# Altium PCB PCB1.PcbDoc
Units mm, origin at the board's own origin, x right, y up, seen from the top; angles counter-clockwise.
Board outline 45.13 x 20.13 mm, 4 copper layers (Top Layer, Signal Layer 1, Signal Layer 2, Bottom Layer), stack 0.778 mm thick; 52 components, 39 nets, 241 pads, 74 vias.
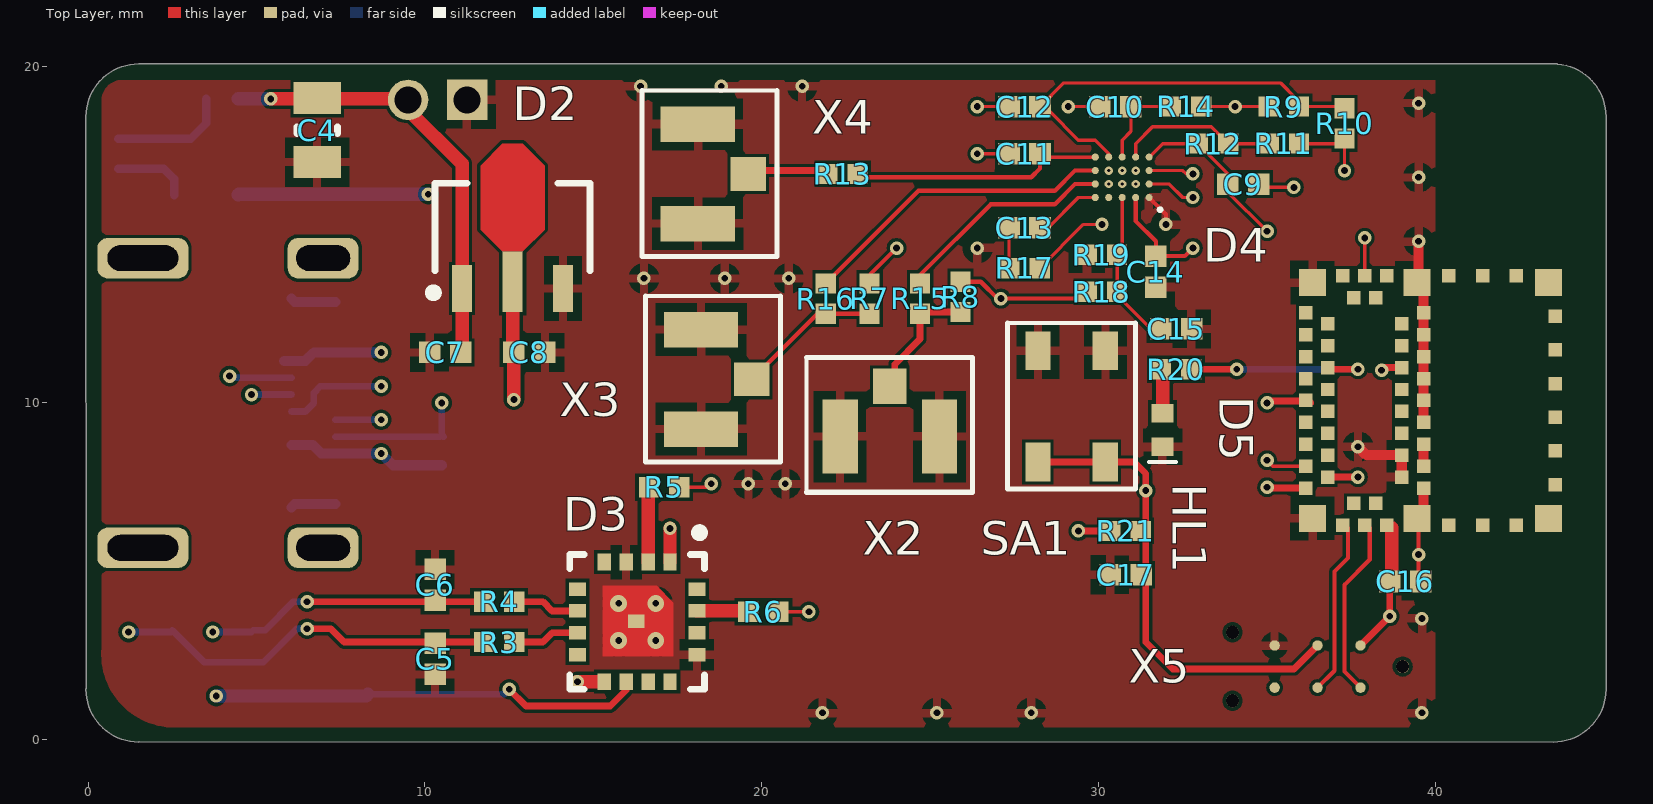
[diagram p0: Top Layer view]
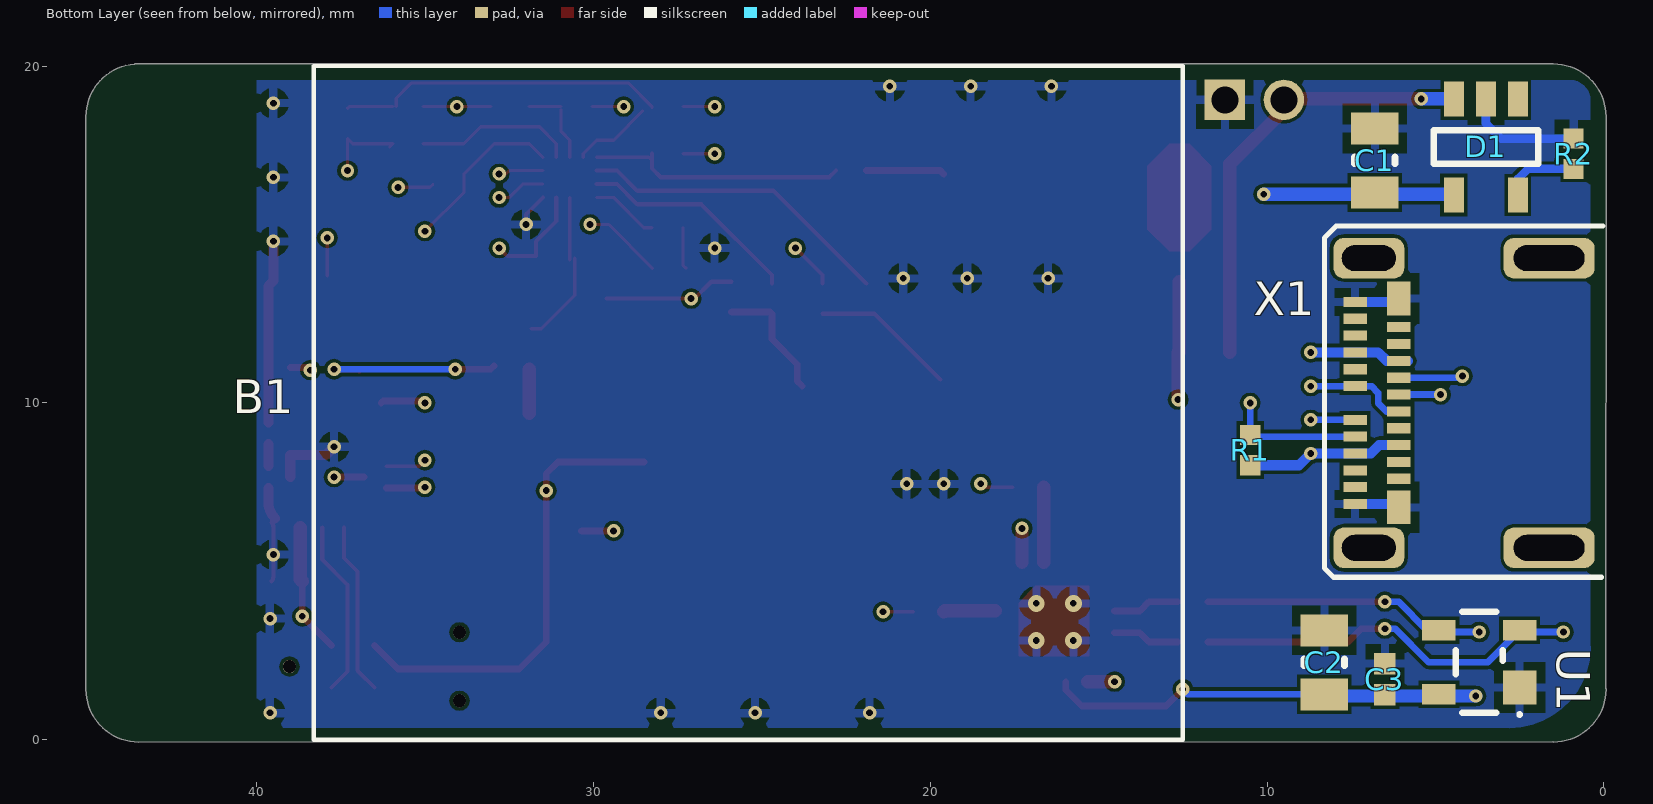
[diagram p1: Bottom Layer view, seen from below]
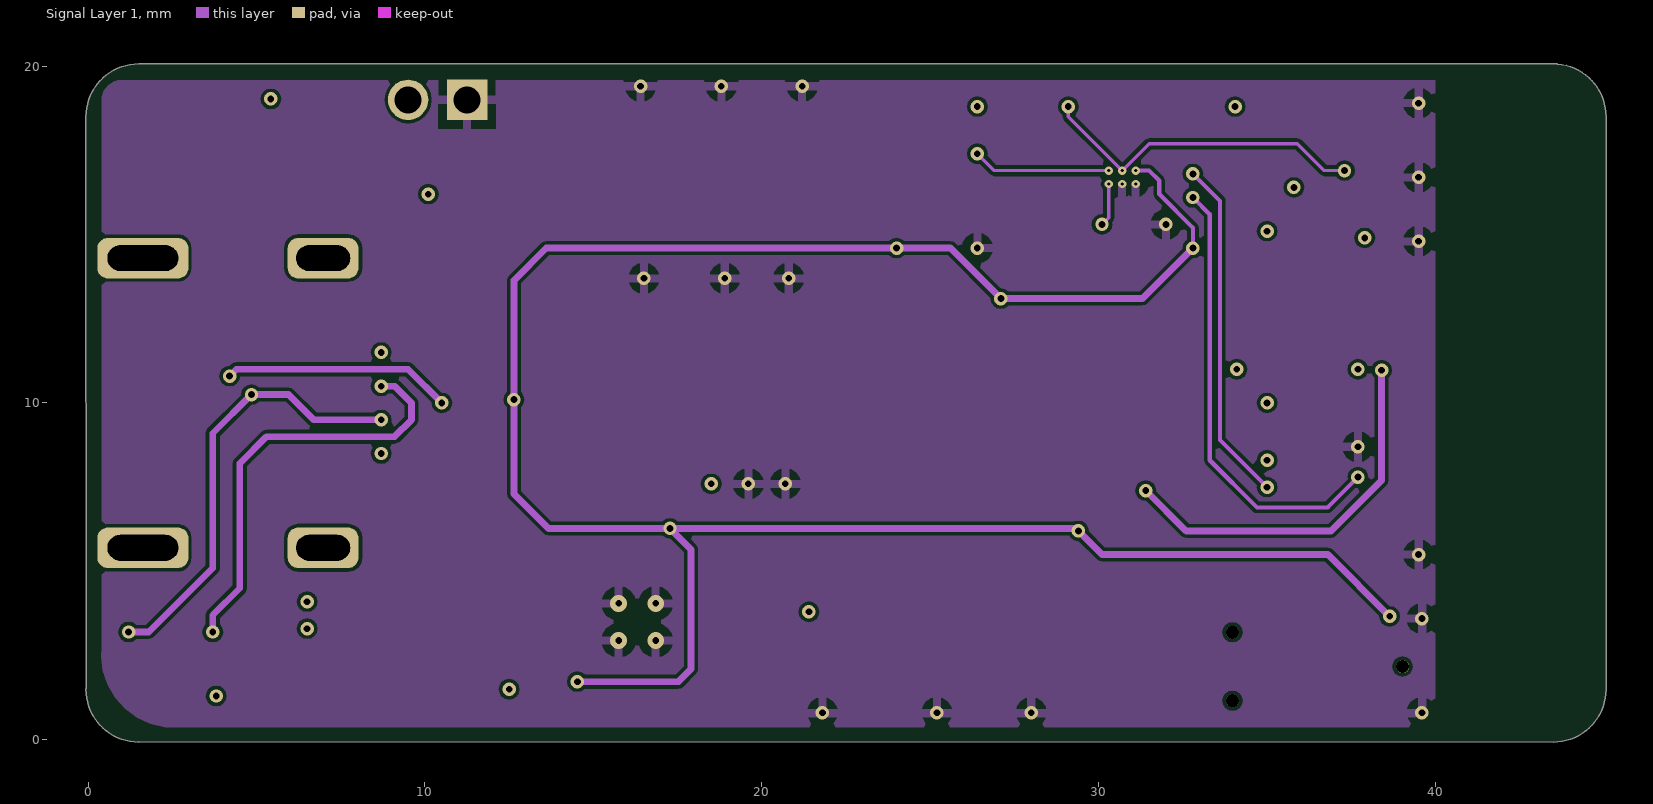
[diagram p2: Signal Layer 1]
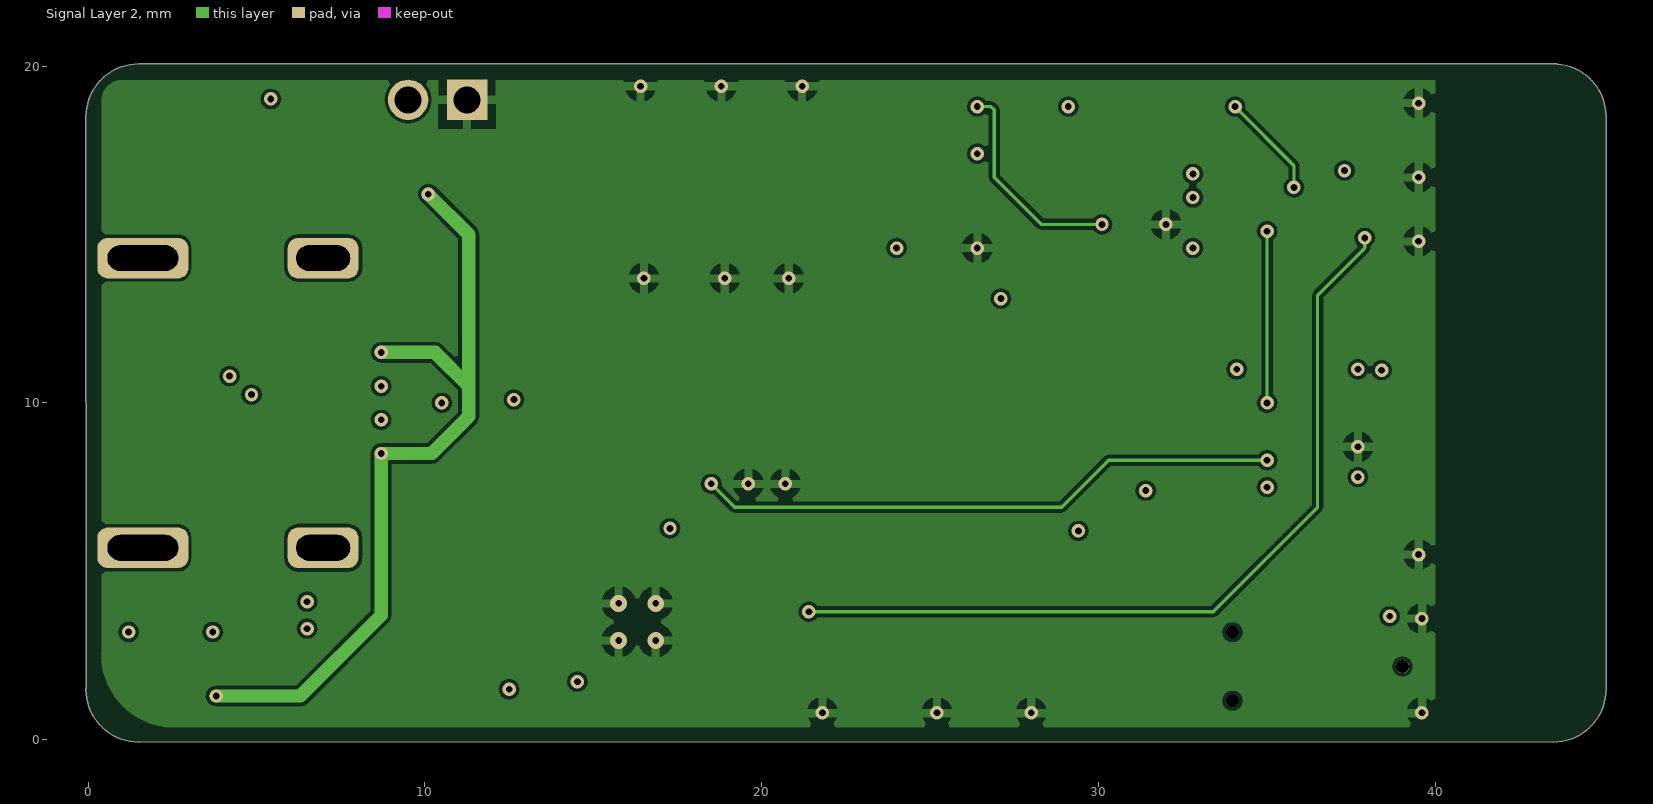
[diagram p3: Signal Layer 2]

## Layer stack, top to bottom
Top Solder: solder mask 0.0102, Solder Resist, Dk 3.5
Top Layer: signal copper 0.0356
Dielectric 1: core 0.254, FR-4, Dk 4.2
Signal Layer 1: signal copper 0.036
Dielectric 3: prepreg 0.127, Dk 4.2
Signal Layer 2: signal copper 0.036
Dielectric 2: core 0.254, Dk 4.2
Bottom Layer: signal copper 0.0356
Bottom Solder: solder mask 0.0102, Solder Resist, Dk 3.5

## Board outline
-0.063,1.52 -0.066,18.5 cw(c-0.003,18.5) -0.066,18.5 cw(c1.5,18.5) 1.5,20.066 43.6,20.066 cw(c43.6,20.003) 43.624,20.061 cw(c43.5,18.5) 45.066,18.5 45.066,1.5 cw(c43.5,1.5) 43.5,-0.066 cw(c43.5,-0.003) 43.493,-0.066 1.52,-0.063 cw(c1.5,-0.003) 1.5,-0.066 cw(c1.5,1.5) -0.066,1.5 cw(c-0.003,1.5)

## Design rules (kind name [scope] priority, off if disabled: settings)
Clearance [All] p1: gap=0.1 ignorepadtopadclearanceinfootprint=FALSE
MinimumSolderMaskSliver [All] p1: minsoldermaskwidth=0.1
PolygonConnect [All] p1: connectstyle=Relief reliefconductorwidth=0.254 reliefentries=4 polygonreliefangle="90 Angle" airgapwidth=0.254
RoutingVias [All] p1: holewidth=0.711 width=1.27 viastyle="Through Hole" minholewidth=0.1 minwidth=0.25 maxholewidth=10 maxwidth=10
SilkToSilkClearance [All] p1: silktosilkclearance=0
SilkToSolderMaskClearance [IsPad] p1: minsilkscreentomaskgap=0.1 clearancetoexposedcopper=TRUE
SolderMaskExpansion [All] p1: expansion=0.1
Width [All] p1: maxlimit=10 minlimit=0.1 preferedwidth=0.25
27 further rules are at their usual default settings.

## Components (designator, comment, footprint, x,y, rotation, side; value= is the part's Value field where it differs from the comment)
B1 "BAT" lION 25,10 r270 bottom
C1 "cap" CAP0805 6.8,17.2 r90 bottom
C2 "cap" CAP0805 8.3,2.3 r90 bottom
C3 "cap" CAP0402 6.5,1.8 r90 bottom
C4 "cap" CAP0805 6.8,18.1 r270 top
C5 "cap" CAP0402 10.3,2.4 r270 top
C6 "cap" CAP0402 10.3,4.6 r90 top
C7 "cap" CAP0402 10.6,11.5 r180 top
C8 "cap" CAP0402 13.1,11.5 r0 top
C9 "cap" CAP0402 34.3,16.5 r180 top
C10 "cap" CAP0402 30.5,18.8 r180 top
C11 "cap" CAP0402 27.8,17.4 r0 top
C12 "cap" CAP0402 27.8,18.8 r0 top
C13 "cap" CAP0402 27.8,15.2 r0 top
C14 "cap" CAP0402 31.7,13.9 r270 top
C15 "cap" CAP0402 32.3,12.2 r0 top
C16 "cap" CAP0402 39.1,4.7 r0 top
C17 "cap" CAP0402 30.8,4.9 r180 top
D1 "LION_BATTARY_CHARGER" SOT95P270X15-5N 3.5,17.6 r270 bottom
D2 "LDO" SOT89-150P409X160-3N 12.6,15.2 r90 top
D3 "FT230X" PQFN65P400X400X80_HS-17N 16.3,3.5 r270 top
D4 "AD8233" BGA20C40P5X4_204X171X56 30.7,16.7 r180 top
D5 "ISP1507AX" LGA6C330P2X3_800X800X100 39.85,10.075 r90 top
HL1 "LED" Chip2PinSM127P600-8N 31.9,9.2 r270 top
R1 "res" RES0402 10.5,8.6 r90 bottom
R2 "res" RES0402 0.9,17.4 r90 bottom
R3 "res" RES0402 12.2,2.9 r180 top
R4 "res" RES0402 12.2,4.1 r180 top
R5 "res" RES0402 17.1,7.5 r0 top
R6 "res" RES0402 20.05,3.8 r0 top
R7 "res" RES0402 23.2,13.1 r270 top
R8 "res" RES0402 25.9,13.15 r270 top
R9 "res" RES0402 35.5,18.8 r0 top
R10 "res" RES0402 37.3,18.3 r270 top
R11 "res" RES0402 35.5,17.7 r180 top
R12 "res" RES0402 33.4,17.7 r0 top
R13 "res" RES0402 22.4,16.8 r180 top
R14 "res" RES0402 32.6,18.8 r0 top
R15 "res" RES0402 24.7,13.1 r270 top
R16 "res" RES0402 21.9,13.1 r270 top
R17 "res" RES0402 27.8,14 r0 top
R18 "res" RES0402 30.1,13.3 r180 top
R19 "res" RES0402 30.1,14.4 r0 top
R20 "res" RES0402 32.3,11 r180 top
R21 "res" RES0402 30.8,6.2 r0 top
SA1 "BUT" IT-1184 29.2,9.9 r90 top
U1 "PRTR5V0U2X" SOT143 3.7,2.3 r0 bottom
X1 "USB_TYPE_C_VAR2" WM12856CT-ND 4.3,10 r90 bottom
X2 "RF-conrct" 1909763-1 23.8,9 r180 top
X3 "RF-conrct" 1909763-1 18.2,10.7 r90 top
X4 "RF-conrct" 1909763-1 18.1,16.8 r90 top
X5 "J-link6.0" J-Link6. 36.5,2.175 r180 top

## Footprints (in the part's own frame and the unit in brackets; to place one, negate y for a bottom-side part, rotate by r counter-clockwise, add the part's x,y. Pads: shape width x height; smd on the part's side, far side on the other; paste and mask are expansions set on the pad)
1909763-1 [mm] "RF-connector"
  rect 1x1.05 smd: 1(0,-1.5)
  rect 1.05x2.2 smd: 2(-1.475,0) 2(1.475,0)
  silkscreen extent -2.45,-2.35 2.47,1.65, body extent -1.4,-1.5 1.4,1.5, height 1.25
BGA20C40P5X4_204X171X56 [mm] "BGA, 20-Leads, Body 2.04x1.71mmx0.56mm, Pitch 0.40mm"
  round 0.21 smd: A1(-0.8,0.6) A2(-0.4,0.6) A3(0,0.6) A4(0.4,0.6) A5(0.8,0.6) B1(-0.8,0.2) B2(-0.4,0.2) B3(0,0.2) B4(0.4,0.2) B5(0.8,0.2) C1(-0.8,-0.2) C2(-0.4,-0.2) C3(0,-0.2) C4(0.4,-0.2) C5(0.8,-0.2) D1(-0.8,-0.6) D2(-0.4,-0.6) D3(0,-0.6) D4(0.4,-0.6) D5(0.8,-0.6)
  silkscreen extent -1.18,0.91 -1.08,1.01, body extent -1.02,-0.85 1.02,0.86, height 0.56
CAP0402 [mm]
  rect 0.64x0.64 smd: 1(-0.46,0) 2(0.46,0)
  body extent -0.55,-0.3 0.55,0.3, height 0.35
CAP0805 [mm]
  rect 0.95x1.4 smd: 1(-0.95,0) 2(0.95,0)
  silkscreen extent -0.1,-0.6 0.1,0.6, body extent -1,-0.63 1,0.63, height 1.35
Chip2PinSM127P600-8N [mm]
  rect 0.55x0.65 smd: 1(-0.5,0) 2(0.5,0)
  silkscreen extent 0.95,-0.4 0.95,0.4, body extent -0.5,-0.25 0.5,0.25, height 0.35
IT-1184 [mm] "TACK-BUTTON"
  rect 1.15x0.75 smd: 1(-1.65,-1) 1(-1.65,1) 2(1.65,-1) 2(1.65,1)
  silkscreen extent -2.45,-1.9 2.47,1.9, body extent -1.7,-1.7 1.7,1.7, height 1.5
J-Link6. [mm]
  round 0.39 hole 0.39 unplated: 0(-2.525,0) 0(2.525,-1.016) 0(2.525,1.016)
  round 0.31 smd: 1(-1.275,-0.625) 2(-1.275,0.625) 3(0,-0.625) 4(0,0.625) 5(1.275,-0.625) 6(1.275,0.625)
LGA6C330P2X3_800X800X100 [mm] "LGA, 6-Leads, Body 8.00x8.00mmx1.00mm, Pitch 3.30mm"
  rect 0.8x0.8 smd: 1(3.5,3.5) 7(3.5,0.4) 25(-3.5,0.4) 31(-3.5,3.5) 52(3.5,-3.5) 59(-3.5,-3.5)
  rect 0.4x0.4 smd: 2(3.7,2.6) 3(3.05,2.275) 4(3.7,1.95) 5(3.05,1.625) 6(3.7,1.3) 8(2.6,0.2) 9(2.275,0.85) 10(1.95,0.2) 11(1.625,0.85) 12(1.3,0.2) 13(0.975,0.85) 14(0.65,0.2) 15(0.325,0.85) 16(0,0.2) 17(-0.325,0.85) 18(-0.65,0.2) 19(-0.975,0.85) 20(-1.3,0.2) 21(-1.625,0.85) 22(-1.95,0.2) 23(-2.275,0.85) 24(-2.6,0.2) 26(-3.7,1.3) 27(-3.05,1.625) 28(-3.7,1.95) 29(-3.05,2.275) 30(-3.7,2.6) 32(-2.6,3.7) 33(-2.275,3.05) 34(-1.95,3.7) 35(-1.625,3.05) 36(-1.3,3.7) 37(-0.975,3.05) 38(-0.65,3.7) 39(-0.325,3.05) 40(0,3.7) 41(0.325,3.05) 42(0.65,3.7) 43(0.975,3.05) 44(1.3,3.7) 45(1.625,3.05) 46(1.95,3.7) 47(2.275,3.05) 48(2.6,3.7) 49(3.7,-0.55) 50(3.7,-1.55) 51(3.7,-2.55) 53(2.5,-3.7) 54(1.5,-3.7) 55(0.5,-3.7) 56(-0.5,-3.7) 57(-1.5,-3.7) 58(-2.5,-3.7) 60(-3.7,-0.55) 61(-3.7,-1.55) 62(-3.7,-2.55)
  body extent -4,-4 4,4, height 1
lION [mm] "20x25X4"
  round 1.2 hole 0.8: 1(-9,15.5)
  rect 1.2x1.2 hole 0.8: 2(-9,13.75)
  silkscreen extent -10,-13.3 10,12.5, body extent -10,-13.3 10,12.5, height 4
PQFN65P400X400X80_HS-17N [mm] "PQFN, 16-Leads, Body 4.00x4.00mm, Pitch 0.65mm, Thermal Pad 2.08x2.08mm, IPC Medium Density"
  rect 0.5x0.4 smd: 1(-1.775,0.975) 2(-1.775,0.325) 3(-1.775,-0.325) 4(-1.775,-0.975) 9(1.775,-0.975) 10(1.775,-0.325) 11(1.775,0.325) 12(1.775,0.975)
  rect 0.4x0.5 smd: 5(-0.975,-1.775) 6(-0.325,-1.775) 7(0.325,-1.775) 8(0.975,-1.775) 13(0.975,1.775) 14(0.325,1.775) 15(-0.325,1.775) 16(-0.975,1.775) 17(-0.025,-0.025)
  Top Layer region: -0.575,1.075 1.025,1.075 1.025,-1.025 -1.075,-1.025 -1.075,0.575
  silkscreen extent -2.77,-2 2,2, body extent -2,-2 2,2, height 0.8
RES0402 [mm] "Chip Resistor, 2-Leads, Body 1.00x0.50mm, IPC Medium Density"
  rect 0.6x0.6 smd: 1(-0.45,0) 2(0.45,0)
  body extent -0.55,-0.3 0.55,0.3, height 0.35
SOT89-150P409X160-3N [mm] "SOT89, 3-Leads, Body 4.50x2.50mm, Pitch 1.50mm, Lead Span 4.1mm, IPC Medium Density"
  rect 1.4x0.6 smd: 1(-1.8,1.5) 3(-1.8,-1.5)
  rect 1.8x0.6 smd: 2(-1.6,0)
  Top Layer region: -0.7,0.3 -0.05,0.95 1.85,0.95 2.5,0.3 2.5,-0.3 1.85,-0.95 -0.05,-0.95 -0.7,-0.3
  silkscreen extent -2.05,-2.3 1.32,2.47, body extent -1.28,-2.3 1.32,2.3, height 1.6
SOT95P270X15-5N [mm] "SOT23, 5-Leads, Body 2.90x2.70mm, Pitch 0.95mm, IPC Medium Density"
  rect 1.05x0.6 smd: 1(-1.425,0.95) 2(-1.425,0) 3(-1.425,-0.95) 4(1.425,-0.95) 5(1.425,0.95)
  silkscreen extent -0.5,-1.55 0.5,1.55, body extent -0.9,-1.55 0.9,1.55, height 1.3
SOT143 [mm]
  rect 1x1 smd: 1(-1.2,0.75)
  rect 1x0.6 smd: 2(-1.2,-0.95) 3(1.2,-0.95) 4(1.2,0.95)
  silkscreen extent -1.25,-1.5 0.7,1.6, body extent -0.7,-1.52 0.7,1.52, height 1.2
WM12856CT-ND [mm] "USB-type-C"
  rect 0.3x0.7 smd: A1(-3,3.085) A2(-2.5,3.085) A3(-2,3.085) A4(-1.5,3.085) A5(-1,3.085) A6(-0.5,3.085) A7(0.5,3.085) A8(1,3.085) A9(1.5,3.085) A10(2,3.085) A11(2.5,3.085) A12(3,3.085) B2(2.25,1.785) B3(1.75,1.785) B4(1.25,1.785) B5(0.75,1.785) B6(0.25,1.785) B7(-0.25,1.785) B8(-0.75,1.785) B9(-1.25,1.785) B10(-1.75,1.785) B11(-2.25,1.785)
  rect 1x0.7 smd: B1(3.1,1.785) B12(-3.1,1.785)
  rrect50% 1.2x2.7 hole 0.762 slot 2.1 at 90 deg: GND(-4.3,-2.675) GND(4.3,-2.675)
  rrect50% 1.2x2.1 hole 0.762 slot 1.6 at 90 deg: GND(-4.3,2.675) GND(4.3,2.675)
  silkscreen extent -5.18,-4.27 5.25,4, body extent -4.47,-4.7 4.47,3.2, height 0.46

## Part data
B1: library part "Li-Polymer 402025", manufacturer=PKCELL, voltage=3.7, capasisctance=150e-3, datasheet=https://cdn-shop.adafruit.com/product-files/1317/C1515_-_Li-Polymer_402025_150mAh_3.7V_with_PCM.pdf, Part Number="Li-Polymer 402025"
C1 C2 C4: library part GRM21BR71C475KA73L, manufacturer=Murata, package=0805, voltage=16V, capasisctance=4.7e-6, datasheet=https://static.c, Part Number=GRM21BR71C475KA73L
C3 C7 C8 C14 C15 C16 C17: library part GRM155R71C104K, manufacturer=Murata, package=0402, voltage=10V, datasheet=https://static.chipdip.ru/lib/250/DOC000250694.pdf, Part Number=GRM155R71C104K
  C3 C7 C8 C16 C17: capasisctance=1e-7
  C14 C15: capasisctance=10e-5
C5 C6: library part GRM1555C1H470J, manufacturer=Murata, package=0402, voltage=16V, capasisctance=4.7e-12, datasheet=https://static.c, Part Number=GRM1555C1H470J
C9: library part GRM155R71H332KA01D, manufacturer=Murata, package=0402, voltage=50V, capasisctance=3.3e-9, datasheet=https://static.c, Part Number=GRM155R71H332KA01D
C10: library part GRM155R71H223KA12B, manufacturer=Murata, package=0402, voltage=50V, capasisctance=22e-9, datasheet=https://static.c, Part Number=GRM155R71H223KA12B
C11: library part GRM1555C1E102JA01D, manufacturer=Murata, package=0402, voltage=16V, capasisctance=1e-9, datasheet=https://static.c, Part Number=GRM1555C1E102JA01D
C12 C13: library part GRM155R71C224KA12D, manufacturer=Murata, package=0402, voltage=16V, capasisctance=22e-8, datasheet=https://static.c, Part Number=GRM155R71C224KA12D
D1: library part MCP73831/2, manufacturer=Microchip, datasheet="D:\test_work\AFE\datasheets\power manadge\21984e.pdf", Part Number=MCP73831/2
D2: library part NJM78L03A, manufacturer=JRC, datasheet="D:\test_work\AFE\datasheets\power manadge\DOC000222907.pdf", Part Number=NJM78L03A
D3: manufacturer="FTDI Chip", datasheet=D:\test_work\AFE\datasheets\uart\DS_FT230X-5395.pdf, Part Number=FT230X
D4: manufacturer="Analog Devices", datasheet=D:\test_work\AFE\datasheets\ad8233\AD8233.pdf, Part Number=AD8233
D5: library part ISP1507, manufacturer="Insight Sip", datasheet=D:\test_work\AFE\datasheets\isp1507\isp_ble_DS1507-1221980.pdf, Part Number=ISP1507
HL1: library part KPHHS-1005CGCK, manufacturer=Kingbring, package=0603, datasheet=https://static.chipdip.ru/lib/195/DOC000195322.pdf, Part Number=KPHHS-1005CGCK
R1 R10 R11: library part RC0402FR-07100KL, manufacturer=YAGEO, package=0402, power=0.062, resistanse=10e5, datasheet=ttps://ru.mouser.com/datasheet/2/447/PYu-RC_Group_51_RoHS_L_10-1527934.pdf, Part Number=RC0402FR-07100KL
R2: library part RC0402FR-0713KL, manufacturer=YAGEO, package=0402, power=0.062, resistanse=13e3, datasheet=ttps://ru.mouser.com/datasheet/2/447/PYu-RC_Group_51_RoHS_L_10-1527934.pdf, Part Number=RC0402FR-0713KL
R3 R4: library part RC0402FR-0727RL, manufacturer=YAGEO, package=0402, power=0.062, resistanse=27e0, datasheet=ttps://ru.mouser.com/datasheet/2/447/PYu-RC_Group_51_RoHS_L_10-1527934.pdf, Part Number=RC0402FR-0727RL
R5 R6: library part RC0402JR-070RL, manufacturer=YAGEO, package=0402, power=0.062, resistanse=0, datasheet=ttps://ru.mouser.com/datasheet/2/447/PYu-RC_Group_51_RoHS_L_10-1527934.pdf, Part Number=RC0402JR-070RL
R7 R8 R17 R18 R19: library part RC0402FR-0710ML, manufacturer=YAGEO, package=0402, power=0.062, resistanse=10e6, datasheet=ttps://ru.mouser.com/datasheet/2/447/PYu-RC_Group_51_RoHS_L_10-1527934.pdf, Part Number=RC0402FR-0710ML
R9 R12 R14: library part RC0402FR-071ML, manufacturer=YAGEO, package=0402, power=0.062, resistanse=1e6, datasheet=ttps://ru.mouser.com/datasheet/2/447/PYu-RC_Group_51_RoHS_L_10-1527934.pdf, Part Number=RC0402FR-071ML
R13: library part RC0402FR-07360KL, manufacturer=YAGEO, package=0402, power=0.062, resistanse=36e5, datasheet=ttps://ru.mouser.com/datasheet/2/447/PYu-RC_Group_51_RoHS_L_10-1527934.pdf, Part Number=RC0402FR-07360KL
R15 R16: library part RC0402FR-07180KL, manufacturer=YAGEO, package=0402, power=0.062, resistanse=18e5, datasheet=ttps://ru.mouser.com/datasheet/2/447/PYu-RC_Group_51_RoHS_L_10-1527934.pdf, Part Number=RC0402FR-07180KL
R20: library part RC0402FR-0751RL, manufacturer=YAGEO, package=0402, power=0.062, resistanse=51, datasheet=ttps://ru.mouser.com/datasheet/2/447/PYu-RC_Group_51_RoHS_L_10-1527934.pdf, Part Number=RC0402FR-0751RL
R21: library part RC0402FR-0710KL, manufacturer=YAGEO, package=0402, power=0.062, resistanse=10e3, datasheet=https://ru.mouser.com/datasheet/2/447/PYu-RC_Group_51_RoHS_L_10-1527934.pdf, Part Number=RC0402FR-0710KL
SA1: library part IT-1184, manufacturer=Switronic, datasheet="D:\test_work\AFE\datasheets\connectors\IT-1184 Series.pdf", Part Number=IT-1184, pin total=1, type=but
X1: library part WM12856CT-ND, manufacturer=Molex, datasheet=D:\test_work\AFE\datasheets\usb_type_c\E1054500101_sd.pdf, Part Number=WM12856CT-ND, pin total=24, type=USB
X2 X3 X4: library part 1909763, manufacturer=TE, datasheet=D:\test_work\AFE\datasheets\connectors\ENG_CD_1909763_B3.pdf, Part Number=1909763, pin total=1, type=RF-SMALLEST
X5: library part J-link6, manufacturer="Jey Link", datasheet=https://www.segger.com/products/debug-probes/j-link/accessories/adapters/6-pin-needle-adapter/, Part Number=J-link6, pin total=6, type=Debug
U1: Part Number=PRTR5V0U2X

## Via types
v1: diameter 0.4, hole 0.2, Top Layer to Bottom Layer, tented both sides, 63 vias
v2: diameter 0.25, hole 0.1, Top Layer to Signal Layer 1, 6 vias
v3: diameter 0.5, hole 0.2, Top Layer to Bottom Layer, 4 vias
v4: diameter 0.4, hole 0.2, Top Layer to Bottom Layer, 1 vias

## Nets (pads, with @x,y where several pads share a name; then routed paths per layer and width w, separated by ;. In a path a pad name is that pad's centre, name@x,y a point inside that pad or via, vN(x,y) a via of type N, cw(c..) or ccw(c..) an arc to the next point about the centre after c; other vN are vias at no path point)
+3V: C8.1 C14.1 C16.1 D2.2 D3.1 D3.9 D4.A2 D4.C2 D5.26 R7.1 R8.1 R18.2 R21.1 X5.1 | length 85.5
  Top Layer w0.125: R7.1 23.2,13.8 v1(24,14.6) ; R8.1 26.5,13.6 27,13.1 v1(27.1,13.1) R18.2@29.6,13.1 ; D4.A2 31.1,15.4 31.7,14.8 C14.1 32.56,14.36 v1(32.8,14.6)
  Top Layer w0.2: v1(29.4,6.2) R21.1 ; X5.1 v1(38.64,3.665) C16.1
  Top Layer w0.4: C8.1@12.6,11.5 D2.2 ; v1(12.64,10.1) C8.1 ; v1(14.525,1.725) D3.9 ; D3.1 v1(17.275,6.275) ; C16.1 38.7,4.76 D5.26@38.7,6.3
  Signal Layer 1 w0.125: v2(31.1,16.9) 31.5,16.9 31.8,16.6 31.8,16.2 32.8,15.2 v1(32.8,14.6)
  Signal Layer 1 w0.2: v1(14.525,1.725) 17.525,1.725 17.9,2.1 17.9,5.65 v1(17.275,6.275) ; v1(32.8,14.6) 31.3,13.1 v1(27.1,13.1) 25.6,14.6 v1(24,14.6) 13.6,14.6 12.64,13.64 v1(12.64,10.1) 12.64,7.3 13.665,6.275 v1(17.275,6.275) ; v1(38.64,3.665) 36.805,5.5 30.1,5.5 v1(29.4,6.2) 29.325,6.275 v1(17.275,6.275)
GND: B1.2 C1.2 C2.2 C3.2 C4.2 C5.2 C6.2 C7.2 C8.2 C14.2 C15.2 C16.2 C17.2 D1.2 D2.3 D3.3 D3.13 D3.17 D4.A1 D4.B2 D4.B3 D5.1 D5.7 D5.8 D5.10 D5.12 D5.14 D5.16 D5.18 D5.21 D5.23 D5.24 D5.25 D5.31 HL1.2 R2.2 R19.1 SA1.2 U1.1 X1.A1 X1.A12 X1.B1 X1.B12 X2.2 X3.2 X4.2 X5.5 | length 17.4
  Top Layer w0.125: D4.A1 32,15.6 v1(32,15.3) ; C16.2 cw(c39.705,4.845) 39.5,4.845 v1(39.5,5.5) 39.5,6.315 cw(c39.705,6.315) D5.25@39.56,6.46
  Top Layer w0.3: v1(37.7,8.7) 37.95,8.45 D5.21 D5.23 ; D5.25 ccw(c38.967,7.058) 39.65,7.058 D5.24 ; v1(39.5,14.8) 39.5,13.625 39.65,13.475 D5.8 D5.10 D5.12 D5.14 D5.16 D5.18
  Bottom Layer w0.254: R2.2 3.05,17.85 3.5,18.3 D1.2
  Bottom Layer w0.3: X1.B12@6.035,6.9 6.135,7 X1.A1@7.335,7 ; X1.B1@6.035,13.1 6.135,13 X1.A12@7.335,13
  other v1: 21.8,0.8 25.2,0.8 28,0.8 39.6,0.8 39.6,3.6 19.6,7.6 20.7,7.6 16.5,13.7 18.9,13.7 20.8,13.7 39.5,16.7 39.5,18.9 16.4,19.4 18.8,19.4 21.2,19.4
  other v2: 30.7,16.5 31.1,16.5
  other v3: 15.75,2.95 16.85,2.95 15.75,4.05 16.85,4.05
  other v4: 26.4,14.6
NetB1_1: B1.1 C4.1 C7.1 D1.3 D2.1 | length 13.2
  Top Layer w0.4: v1(5.425,19.025) 9.475,19.025 9.475,18.725 11.1,17.1 D2.1 C7.1@11.1,11.5
  Bottom Layer w0.4: D1.3 v1(5.425,19.025)
NetC1_1: C1.1 C2.1 C3.1 D1.4 D3.10 R1.1 U1.4 X1.A4 X1.A9 X1.B4 X1.B9 | length 50.1
  Top Layer w0.2: v1(12.5,1.5) 13,1 15.5,1 15.975,1.475 D3.10
  Signal Layer 2 w0.4: v1(3.8,1.3) 6.3,1.3 8.7,3.7 v1(8.7,8.5) 10.2,8.5 11.3,9.6 11.3,10.5 ; v1(8.7,11.5) 10.3,11.5 11.3,10.5 ; v1(10.1,16.2) 11.3,15 11.3,10.5
  Bottom Layer w0.2: C2.1 12.35,1.35 v1(12.5,1.5)
  Bottom Layer w0.3: X1.B4@5.815,11.25 X1.B4 6.45,11.25 6.7,11.5 X1.A9 v1(8.7,11.5) ; X1.B9@6.035,8.75 X1.B9 6.67,8.75 6.92,8.5 X1.A4 v1(8.7,8.5) 9.05,8.15 R1.1
  Bottom Layer w0.4: v1(3.8,1.3) 8.25,1.3 C2.1 ; D1.4 4.475,16.2 v1(10.1,16.2)
NetC5_1: C5.1 R3.2 U1.2 X1.A6 X1.B6 | length 27.2
  Top Layer w0.2: v1(6.5,3.3) 7.2,3.3 7.6,2.9 R3.2
  Signal Layer 1 w0.2: v1(1.2,3.2) 1.8,3.2 3.7,5.1 3.7,9.1 v1(4.85,10.25) 5.95,10.25 6.7,9.5 v1(8.7,9.5)
  Bottom Layer w0.2: v1(1.2,3.2) 2.45,3.2 U1.2 3.45,2.3 5.2,2.3 6.2,3.3 v1(6.5,3.3) ; v1(4.85,10.25) X1.B6@6.035,10.25 ; X1.A6@7.335,9.5 v1(8.7,9.5)
NetC6_1: C6.1 R4.2 U1.3 X1.A7 X1.B7 | length 24.2
  Top Layer w0.2: v1(6.5,4.1) 7.2,4.1 R4.2
  Signal Layer 1 w0.2: v1(3.7,3.2) 3.7,3.7 4.5,4.5 4.5,8.2 5.3,9 9.1,9 9.6,9.5 9.6,10 9.1,10.5 v1(8.7,10.5)
  Bottom Layer w0.2: v1(3.7,3.2) 4.85,3.2 U1.3 5.25,3.25 6.1,4.1 v1(6.5,4.1) ; X1.B7@6.035,9.75 X1.B7 6.45,9.75 6.7,10 6.7,10.3 6.9,10.5 X1.A7 v1(8.7,10.5)
NetC9_1: C9.1 R9.1 R14.2 | length 6.2
  Top Layer w0.1: R14.2 v1(34.05,18.8) R9.1 ; C9.1 34.86,16.4 v1(35.8,16.4)
  Signal Layer 2 w0.1: v1(34.05,18.8) 35.8,17.05 v1(35.8,16.4)
NetC9_2: C9.2 D4.D1 D5.40 R12.1 | length 11.5
  Top Layer w0.1: D4.D1 31.9,17.7 R12.1 33.84,16.81 C9.2 33.84,16.26 v1(35,15.1)
  Top Layer w0.2: v1(35,10) 35.06,10.06 36.24,10.06 D5.40@36.3,10
  Signal Layer 2 w0.1: v1(35,10) v1(35,15.1)
NetC10_1: C10.1 D4.D3 R14.1 | length 2.4
  Top Layer w0.1: D4.D3 30.7,17.8 30.96,18.06 C10.1@30.96,18.7 ; C10.1 R14.1@31.9,18.8
NetC10_2: C10.2 D4.C3 R10.2 R11.1 | length 13.3
  Top Layer w0.1: v1(29.1,18.8) C10.2 ; R11.1@36.05,17.6 R11.1 37.15,17.7 R10.2 v1(37.3,16.9)
  Signal Layer 1 w0.1: v1(29.1,18.8) 29.1,18.5 v2(30.7,16.9) 31.5,17.7 35.9,17.7 36.7,16.9 v1(37.3,16.9)
NetC11_1: C11.1 D4.C4 | length 5
  Top Layer w0.1: v1(26.4,17.4) C11.1
  Signal Layer 1 w0.1: v1(26.4,17.4) 26.9,16.9 v2(30.3,16.9)
NetC11_2: C11.2 D4.D5 R13.1 | length 7.8
  Top Layer w0.1: C11.2@28.26,17.2 28.36,17.3 D4.D5
  Top Layer w0.125: R13.1@22.8,16.9 23,16.7 28,16.7 28.26,16.96 28.26,17.2 C11.2
NetC12_1: C12.1 D4.B4 R17.2 | length 10.9
  Top Layer w0.1: v1(26.4,18.8) C12.1 ; R17.2 29.55,15.3 v1(30.1,15.3)
  Signal Layer 1 w0.1: v1(30.1,15.3) 30.3,15.5 v2(30.3,16.5)
  Signal Layer 2 w0.1: v1(26.4,18.8) 26.8,18.8 26.9,18.7 26.9,16.7 28.3,15.3 v1(30.1,15.3)
NetC12_2: C12.2 D4.D4 R9.2 R10.1 | length 12.1
  Top Layer w0.1: C12.2@28.26,18.76 C12.2 28.96,19.5 35.4,19.5 35.85,19.05 R9.2@35.85,18.8 ; C12.2@28.53,18.67 29.4,17.8 29.9,17.8 30.3,17.4 D4.D4 ; R9.2 37.25,18.8 R10.1
NetC13_1: C13.1 R17.1 | length 1.2
  Top Layer w0.1: R17.1@27.25,14 27.34,14.09 C13.1
NetC13_2: C13.2 D4.A5 | length 2
  Top Layer w0.1: C13.2 28.5,15.2 29.4,16.1 D4.A5
NetC15_1: C15.1 D4.A3 R18.1 R19.2 | length 4.7
  Top Layer w0.1: R19.2@30.55,14.3 R18.1 30.55,13.2 31.55,12.2 C15.1 ; R19.2@30.7,14.25 D4.A3
NetC17_1: C17.1 D5.13 R21.2 SA1.1 X5.3 | length 25.9
  Top Layer w0.2: SA1.1@28.5,8.25 30.2,8.25 31.05,8.25 31.4,7.9 v1(31.4,7.4) 31.4,2.9 32.2,2.1 35.8,2.1 X5.3 ; v1(38.4,10.975) 38.475,11.05 D5.13
  Signal Layer 1 w0.2: v1(31.4,7.4) 32.6,6.2 36.9,6.2 38.4,7.7 v1(38.4,10.975)
  Bottom Layer w0.2: v1@38.35,10.925 v1(38.4,10.975)
NetD1_5: D1.5 R2.1 | length 2.2
  Bottom Layer w0.254: R2.1 2.25,16.95 2.55,16.65 D1.5
NetD3_2: D3.2 R5.1 | length 2.2
  Top Layer w0.4: D3.2 R5.1@16.625,7.5
NetD3_6: D3.6 R4.1 | length 2
  Top Layer w0.2: R4.1 13.5,4.1 13.775,3.825 D3.6
NetD3_7: D3.7 R3.1 | length 2
  Top Layer w0.2: R3.1 13.5,2.9 13.775,3.175 D3.7
NetD3_15: D3.15 R6.1 | length 1.5
  Top Layer w0.4: D3.15 19.575,3.825 R6.1
NetD4_B1: D4.B1 D5.33 | length 15.7
  Top Layer w0.1: D4.B1 32.1,16.5 32.5,16.1 v1(32.8,16.1)
  Top Layer w0.2: D5.33 v1(37.7,7.8)
  Signal Layer 1 w0.125: v1(32.8,16.1) 33.3,15.6 33.3,8.3 34.7,6.9 36.8,6.9 v1(37.7,7.8)
NetD4_B5: D4.B5 R15.1 | length 6.6
  Top Layer w0.125: R15.1 24.7,13.8 26.8,15.9 28.7,15.9 29.3,16.5 D4.B5
NetD4_C1: D4.C1 D5.32 | length 12.8
  Top Layer w0.1: D4.C1 32.5,16.9 32.6,16.8 v1(32.8,16.8)
  Top Layer w0.2: v1@34.9,7.475 D5.32
  Signal Layer 1 w0.125: v1(32.8,16.8) 33.6,16 33.6,8.9 v1(35,7.5)
NetD4_C5: D4.C5 R16.1 | length 9.4
  Top Layer w0.125: R16.1 24.65,16.3 28.7,16.3 29.3,16.9 D4.C5
NetD4_D2: D4.D2 R11.2 R12.2 | length 4.8
  Top Layer w0.1: D4.D2 31.1,17.7 31.6,18.2 33.35,18.2 R12.2 R11.2
NetD5_4: D5.4 R6.2 | length 27.1
  Top Layer w0.1: R6.2 v1(21.4,3.8) ; D5.4 v1(37.9,14.9)
  Signal Layer 2 w0.1: v1@21.3,3.8 v1(21.4,3.8) 33.4,3.8 36.5,6.9 36.5,13.2 37.9,14.6 v1(37.9,14.9)
NetD5_20: D5.20 D5.22 | length 0.7
  Top Layer w0.3: D5.22 D5.20
NetD5_28: D5.28 X5.2 | length 5.3
  Top Layer w0.125: X5.2 37.3,2.025 37.3,4.6 38.05,5.35 D5.28@38.05,6.3
NetD5_30: D5.30 X5.4 | length 5.1
  Top Layer w0.125: X5.4 37,2.05 37,5 37.4,5.4 D5.30@37.4,6.3
NetD5_34: D5.34 R5.2 | length 19.6
  Top Layer w0.1: R5.2 18.4,7.5 v1(18.5,7.6) ; v1(35,8.3) 35.175,8.125 D5.34
  Signal Layer 2 w0.1: v1(18.5,7.6) 19.2,6.9 28.9,6.9 30.3,8.3 v1(35,8.3)
NetD5_43: D5.43 R20.1 | length 5.6
  Top Layer w0.2: R20.1@32.95,11.1 33.05,11 v1(34.1,11) ; D5.43@36.95,10.975 36.975,11 v1(37.7,11)
  Bottom Layer w0.2: v1(34.1,11) v1(37.7,11)
NetHL1_1: HL1.1 R20.2 | length 1.3
  Top Layer w0.4: HL1.1 R20.2@31.9,11
NetR1_2: R1.2 X1.A5 X1.B5 | length 12.9
  Signal Layer 1 w0.2: v1(4.2,10.8) 4.4,11 9.5,11 v1(10.5,10)
  Bottom Layer w0.2: v1(4.2,10.8) 4.25,10.75 X1.B5@6.035,10.75 ; X1.A5@7.335,9 X1.A5 10.45,9 R1.2 ; v1(10.5,10) R1.2 ; R1.2@10.55,9 R1.2
NetR7_2: R7.2 R16.2 X3.1 | length 4.3
  Top Layer w0.125: X3.1 21.65,12.65 R16.2 R7.2
NetR8_2: R8.2 R15.2 X2.1 | length 3.7
  Top Layer w0.2: X2.1 23.95,10.65 23.95,11.15 24.7,11.9 R15.2 24.75,12.7 R8.2
NetR13_2: R13.2 X4.1 | length 2.3
  Top Layer w0.2: X4.1 19.7,16.9 R13.2@21.9,16.9
pads on no net: D1.1 D3.4 D3.5 D3.8 D3.11 D3.12 D3.14 D3.16 D4.A4 D5.2 D5.3 D5.5 D5.6 D5.9 D5.11 D5.15 D5.17 D5.19 D5.27 D5.29 D5.35 D5.36 D5.37 D5.38 D5.39 D5.41 D5.42 D5.44 D5.45 D5.46 D5.47 D5.48 D5.49 D5.50 D5.51 D5.52 D5.53 D5.54 D5.55 D5.56 D5.57 D5.58 D5.59 D5.60 D5.61 D5.62 X1.A2 X1.A3 X1.A8 X1.A10 X1.A11 X1.B2 X1.B3 X1.B8 X1.B10 X1.B11 X1.GND X5.0 X5.6

## Polygon pours and split planes (outlines as drawn)
GND on Signal Layer 2 "Drill Drawing-No Net" (solid, remove dead copper, pour order 4): 40,0.365 40,19.576 0.874,19.576 ccw(c1.029,18.966) 0.4,18.966 0.4,18.846 0.4,2.705 ccw(c2.569,2.539) 2.5,0.365
GND on Bottom Layer "Drill Drawing-No Net" (solid, remove dead copper, pour order 6): 40,0.36 40,19.576 0.874,19.576 ccw(c1.029,18.966) 0.4,18.966 0.4,18.846 0.4,2.868 ccw(c2.804,2.761) 2.966,0.36
GND on Signal Layer 1 "Drill Drawing-No Net" (solid, remove dead copper, pour order 8): 40,0.365 40,19.576 0.874,19.576 ccw(c1.029,18.966) 0.4,18.966 0.4,18.846 0.4,2.705 ccw(c2.569,2.539) 2.5,0.365
GND on Top Layer "Drill Drawing-No Net" (solid, remove dead copper, pour order 10): 40,0.365 40,19.576 0.874,19.576 ccw(c1.029,18.966) 0.4,18.966 0.4,18.846 0.4,2.705 ccw(c2.569,2.539) 2.5,0.365

## Silkscreen, mask and mechanical layers (free items; w line width, h text height)
Mechanical 5:
  lines w0.125: -0.003,1.5 ccw(c1.5,1.5) 1.5,-0.003 ; 0,1.5 -0.003,18.5 cw(c1.5,18.5) 1.5,20.003 43.6,20.003 ; 1.5,0 43.5,-0.003 ccw(c43.5,1.5) 45.003,1.5 45.003,18.5 ccw(c43.5,18.5) 43.5,20.003 ; 40,-0.003 40,20.003